# EAGLE board canprotoshieldcpy (EAGLE 7.2.0)
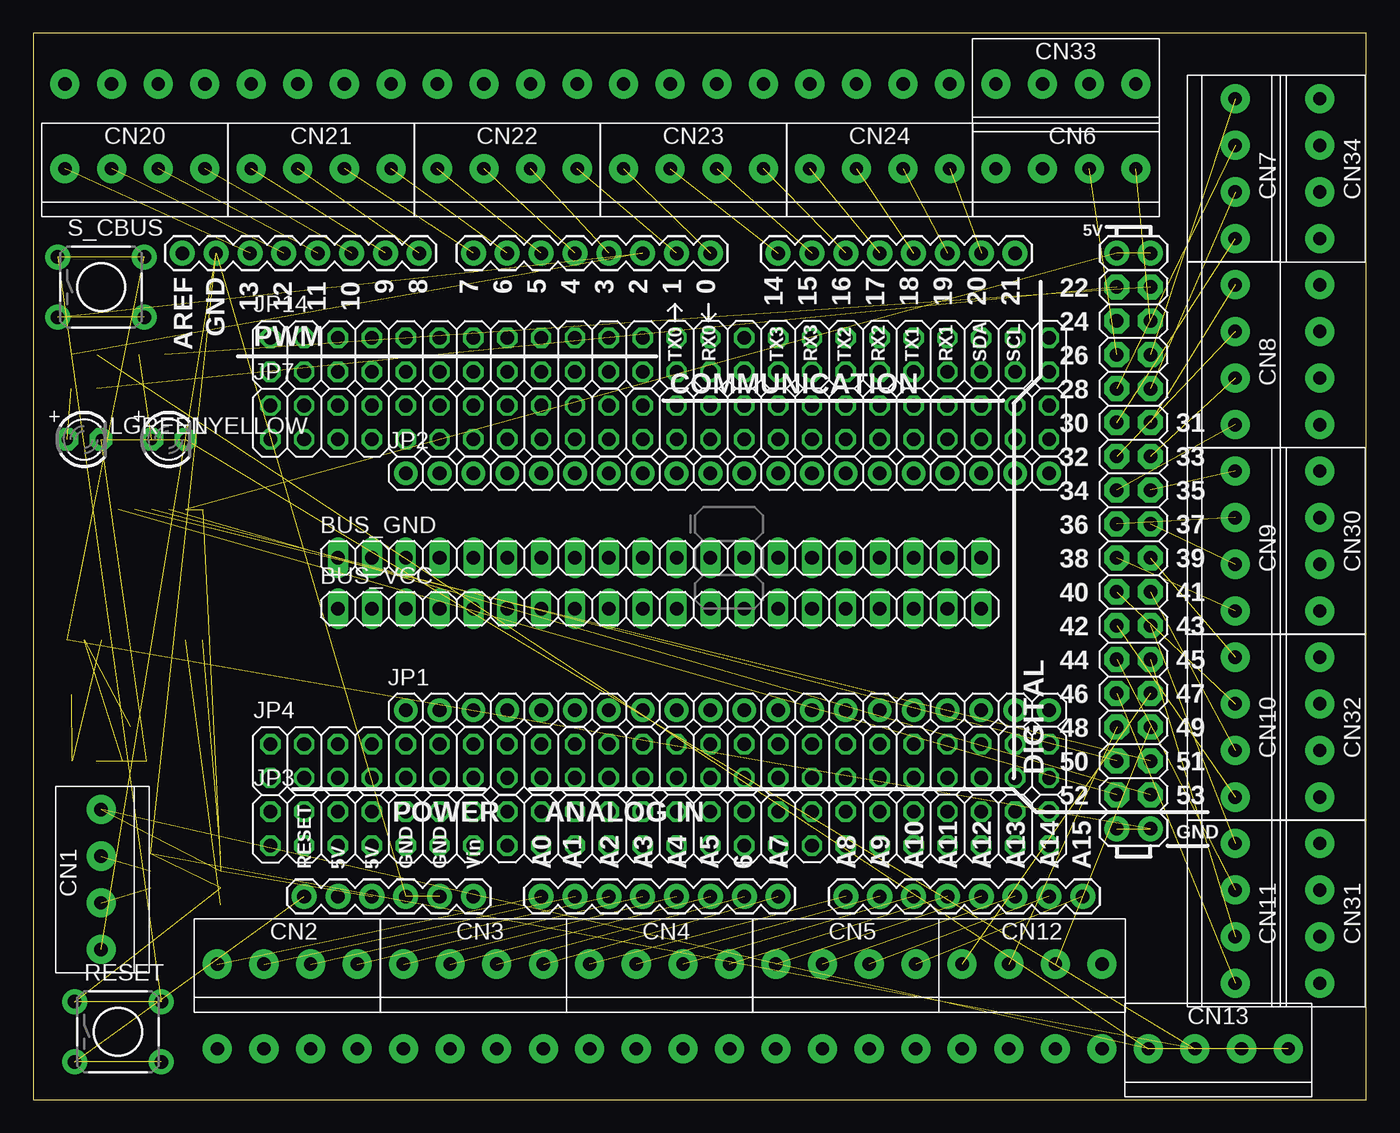
[diagram p0: board, top side]
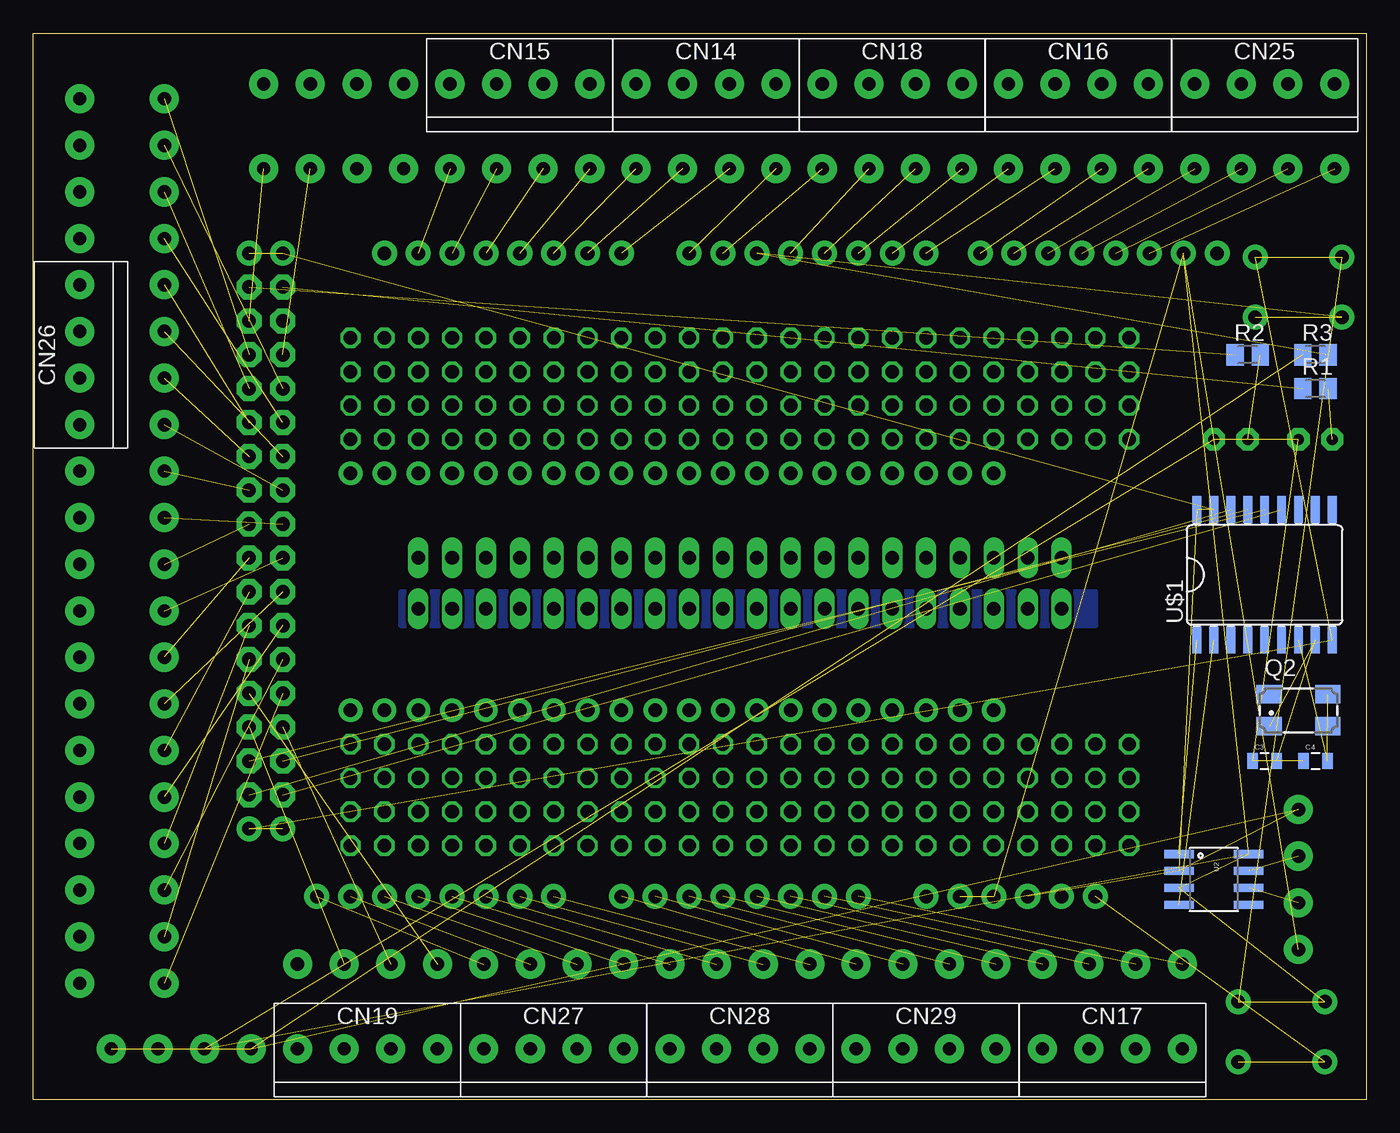
[diagram p1: board, bottom side, seen from below]

Size 100 x 80 mm. Coordinates in mm from the lower left corner, seen from the top.
Outline: 0,0 100,0 100,80 0,80 0,0
Copper layers (1*16): Top 0.035mm / dielectric 1.5mm / Bottom 0.035mm
Design rules "default": minimum track width 10mil, minimum drill 24mil, track to track 8mil, track to pad 8mil, pad to pad 8mil, via to via 8mil, smd to smd 8mil, copper to edge 40mil, drill to drill 8mil, minimum pad ring 10mil, minimum via ring 8mil, stop-mask expansion 4mil, vias tented up to drill 0mil, thermal gap 10mil

## Footprints (pad centres in the part's own frame; a part is rotated, then mirrored left to right if it is on the bottom)
1X20 = drill 1.016 long: 1 -24.13,0; 2 -21.59,0; 3 -19.05,0; 4 -16.51,0; 5 -13.97,0; 6 -11.43,0; 7 -8.89,0; 8 -6.35,0; 9 -3.81,0; 10 -1.27,0; 11 1.27,0; 12 3.81,0; 13 6.35,0; 14 8.89,0; 15 11.43,0; 16 13.97,0; 17 16.51,0; 18 19.05,0; 19 21.59,0; 20 24.13,0
0805 = smd 0.8 x 1.2: 1 -0.9,0; 2 0.9,0
1X04-3.5MM = drill 1 pad 2.184: 1 -5.25,0; 2 -1.75,0; 3 1.75,0; 4 5.25,0
1X20-BIG = drill 1.016 pad 1.778: 1 -24.13,0; 2 -21.59,0; 3 -19.05,0; 4 -16.51,0; 5 -13.97,0; 6 -11.43,0; 7 -8.89,0; 8 -6.35,0; 9 -3.81,0; 10 -1.27,0; 11 1.27,0; 12 3.81,0; 13 6.35,0; 14 8.89,0; 15 11.43,0; 16 13.97,0; 17 16.51,0; 18 19.05,0; 19 21.59,0; 20 24.13,0
2X24 = drill 1.016 octagon: 1 -27.94,-1.27; 2 -27.94,1.27; 3 -25.4,-1.27; 4 -25.4,1.27; 5 -22.86,-1.27; 6 -22.86,1.27; 7 -20.32,-1.27; 8 -20.32,1.27; 9 -17.78,-1.27; 10 -17.78,1.27; 11 -15.24,-1.27; 12 -15.24,1.27; 13 -12.7,-1.27; 14 -12.7,1.27; 15 -10.16,-1.27; 16 -10.16,1.27; 17 -7.62,-1.27; 18 -7.62,1.27; 19 -5.08,-1.27; 20 -5.08,1.27; 21 -2.54,-1.27; 22 -2.54,1.27; 23 0,-1.27; 24 0,1.27; 25 2.54,-1.27; 26 2.54,1.27; 27 5.08,-1.27; 28 5.08,1.27; 29 7.62,-1.27; 30 7.62,1.27; 31 10.16,-1.27; 32 10.16,1.27; 33 12.7,-1.27; 34 12.7,1.27; 35 15.24,-1.27; 36 15.24,1.27; 37 17.78,-1.27; 38 17.78,1.27; 39 20.32,-1.27; 40 20.32,1.27; 41 22.86,-1.27; 42 22.86,1.27; 43 25.4,-1.27; 44 25.4,1.27; 45 27.94,-1.27; 46 27.94,1.27; 47 30.48,-1.27; 48 30.48,1.27
LED3MM = drill 0.813 pad 1.676 octagon: A -1.27,0; K 1.27,0
CTS406 = smd 1.9 x 1.4: 1 -2.2,-1.2; 2 2.2,-1.2; 3 2.2,1.2; 4 -2.2,1.2
M2012 = smd 1.3 x 1.6: 1 -0.95,0; 2 0.95,0
TACTILE-PTH = drill 1.016 pad 1.88: 1 -3.251,2.261; 2 3.251,2.261; 3 -3.251,-2.261; 4 3.251,-2.261
SO08 = smd 0.61 x 2.21: 1 -1.905,-2.616; 2 -0.635,-2.616; 3 0.635,-2.616; 4 1.905,-2.616; 5 1.905,2.616; 6 0.635,2.616; 7 -0.635,2.616; 8 -1.905,2.616
ARDUINO_MEGA = drill 1.016 pad 1.88: 0 63.5,50.8; 1 60.96,50.8; 2 58.42,50.8; 3 55.88,50.8; 3.3V 35.56,2.54; 4 53.34,50.8; 5 50.8,50.8; 5V@0 38.1,2.54; 5V@1 93.98,50.8; 5V@2 96.52,50.8; 6 48.26,50.8; 7 45.72,50.8; 8 41.656,50.8; 9 39.116,50.8; 10 36.576,50.8; 11 34.036,50.8; 12 31.496,50.8; 13 28.956,50.8; 14 68.58,50.8; 15 71.12,50.8; 16 73.66,50.8; 17 76.2,50.8; 18 78.74,50.8; 19 81.28,50.8; 20 83.82,50.8; 21 86.36,50.8; A0 50.8,2.54; A1 53.34,2.54; A2 55.88,2.54; A3 58.42,2.54; A4 60.96,2.54; A5 63.5,2.54; A6 66.04,2.54; A7 68.58,2.54; A8 73.66,2.54; A9 76.2,2.54; A10 78.74,2.54; A11 81.28,2.54; A12 83.82,2.54; A13 86.36,2.54; A14 88.9,2.54; A15 91.44,2.54; AREF 23.876,50.8; GND@0 40.64,2.54; GND@1 43.18,2.54; GND@2 93.98,7.62; GND@3 96.52,7.62; GND@4 26.416,50.8; RESET 33.02,2.54; VIN 45.72,2.54 | drill 1.016 pad 1.88 octagon: 22 93.98,48.26; 23 96.52,48.26; 24 93.98,45.72; 25 96.52,45.72; 26 93.98,43.18; 27 96.52,43.18; 28 93.98,40.64; 29 96.52,40.64; 30 93.98,38.1; 31 96.52,38.1; 32 93.98,35.56; 33 96.52,35.56; 34 93.98,33.02; 35 96.52,33.02; 36 93.98,30.48; 37 96.52,30.48; 38 93.98,27.94; 39 96.52,27.94; 40 93.98,25.4; 41 96.52,25.4; 42 93.98,22.86; 43 96.52,22.86; 44 93.98,20.32; 45 96.52,20.32; 46 93.98,17.78; 47 96.52,17.78; 48 93.98,15.24; 49 96.52,15.24; 50 93.98,12.7; 51 96.52,12.7; 52 93.98,10.16; 53 96.52,10.16
SO18L = smd 0.66 x 2.032: 1 -5.08,-4.902; 2 -3.81,-4.902; 3 -2.54,-4.902; 4 -1.27,-4.902; 5 0,-4.902; 6 1.27,-4.902; 7 2.54,-4.902; 8 3.81,-4.902; 9 5.08,-4.902; 10 5.08,4.902; 11 3.81,4.902; 12 2.54,4.902; 13 1.27,4.902; 14 0,4.902; 15 -1.27,4.902; 16 -2.54,4.902; 17 -3.81,4.902; 18 -5.08,4.902

## Placement (x,y rotation side)
BUS_GND  [1X20]  46.99,40.64 0 top
BUS_VCC  [1X20]  46.99,36.83 0 top
C3  10pF  [0805]  7.62,25.4 0 bottom
C4  10pF  [0805]  3.81,25.4 0 bottom
CN1  1X4-3.5MM  [1X04-3.5MM]  5.08,16.51 90 top
CN2  1X4-3.5MM  [1X04-3.5MM]  19.05,10.16 0 top
CN3  1X4-3.5MM  [1X04-3.5MM]  33.02,10.16 0 top
CN4  1X4-3.5MM  [1X04-3.5MM]  46.99,10.16 0 top
CN5  1X4-3.5MM  [1X04-3.5MM]  60.96,10.16 0 top
CN6  1X4-3.5MM  [1X04-3.5MM]  77.47,69.85 0 top
CN7  1X4-3.5MM  [1X04-3.5MM]  90.17,69.85 270 top
CN8  1X4-3.5MM  [1X04-3.5MM]  90.17,55.88 270 top
CN9  1X4-3.5MM  [1X04-3.5MM]  90.17,41.91 270 top
CN10  1X4-3.5MM  [1X04-3.5MM]  90.17,27.94 270 top
CN11  1X4-3.5MM  [1X04-3.5MM]  90.17,13.97 270 top
CN12  1X4-3.5MM  [1X04-3.5MM]  74.93,10.16 0 top
CN13  1X4-3.5MM  [1X04-3.5MM]  88.9,3.81 0 top
CN14  1X4-3.5MM  [1X04-3.5MM]  49.53,76.2 0 bottom
CN15  1X4-3.5MM  [1X04-3.5MM]  63.5,76.2 0 bottom
CN16  1X4-3.5MM  [1X04-3.5MM]  21.59,76.2 0 bottom
CN17  1X4-3.5MM  [1X04-3.5MM]  19.05,3.81 0 bottom
CN18  1X4-3.5MM  [1X04-3.5MM]  35.56,76.2 0 bottom
CN19  1X4-3.5MM  [1X04-3.5MM]  74.93,3.81 0 bottom
CN20  1X4-3.5MM  [1X04-3.5MM]  7.62,69.85 0 top
CN21  1X4-3.5MM  [1X04-3.5MM]  21.59,69.85 0 top
CN22  1X4-3.5MM  [1X04-3.5MM]  35.56,69.85 0 top
CN23  1X4-3.5MM  [1X04-3.5MM]  49.53,69.85 0 top
CN24  1X4-3.5MM  [1X04-3.5MM]  63.5,69.85 0 top
CN25  1X4-3.5MM  [1X04-3.5MM]  7.62,76.2 0 bottom
CN26  1X4-3.5MM  [1X04-3.5MM]  96.52,55.88 90 bottom
CN27  1X4-3.5MM  [1X04-3.5MM]  60.96,3.81 0 bottom
CN28  1X4-3.5MM  [1X04-3.5MM]  46.99,3.81 0 bottom
CN29  1X4-3.5MM  [1X04-3.5MM]  33.02,3.81 0 bottom
CN30  1X4-3.5MM  [1X04-3.5MM]  96.52,41.91 270 top
CN31  1X4-3.5MM  [1X04-3.5MM]  96.52,13.97 270 top
CN32  1X4-3.5MM  [1X04-3.5MM]  96.52,27.94 270 top
CN33  1X4-3.5MM  [1X04-3.5MM]  77.47,76.2 0 top
CN34  1X4-3.5MM  [1X04-3.5MM]  96.52,69.85 270 top
JP1  [1X20-BIG]  52.07,29.21 0 top
JP2  [1X20-BIG]  52.07,46.99 0 top
JP3  [2X24]  45.72,20.32 0 top
JP4  [2X24]  45.72,25.4 0 top
JP7  [2X24]  45.72,50.8 0 top
JP14  [2X24]  45.72,55.88 0 top
LGREEN  2.2V  [LED3MM]  3.81,49.53 0 top
LYELLOW  2.2V  [LED3MM]  10.16,49.53 0 top
Q2  [CTS406]  5.08,29.21 0 bottom
R1  220  [M2012]  3.81,53.34 0 bottom
R2  220  [M2012]  8.89,55.88 0 bottom
R3  10k  [M2012]  3.81,55.88 0 bottom
RESET  [TACTILE-PTH]  6.35,5.08 0 top
S_CBUS  [TACTILE-PTH]  5.08,60.96 0 top
U2  MCP2551  [SO08]  11.43,16.51 270 bottom
U3  ARDUINO-MEGAFULL  [ARDUINO_MEGA]  -12.7,12.7 0 top
U$1  MCP2515SO  [SO18L]  7.62,39.37 0 bottom

## Library data of the parts
BUS_GND BUS_VCC JP1 JP2 LGREEN LYELLOW R1-R3 = adafruit
C3 C4 = SparkFun-Capacitors
CN1-CN34 U3 = Arduino_merg
JP3 JP4 JP7 JP14 = pinhead
Q2 = adafruit; OC_FARNELL: unknown; OC_NEWARK: unknown
RESET S_CBUS = SparkFun-Retired
U2 = SparkFun-DigitalIC; PROD_ID: IC-09907
U$1 = MCP2515_MT

## Nets
0: CN23.1 U3.0
1: CN22.4 U3.1
2: R3.2 S_CBUS.3 S_CBUS.4 U3.2
3: CN22.3 U3.3
4: CN22.2 U3.4
5: CN22.1 U3.5
6: CN21.4 U3.6
7: CN21.3 U3.7
8: CN21.2 U3.8
9: CN21.1 U3.9
10: CN20.4 U3.10
11: CN20.3 U3.11
12: CN20.2 U3.12
13: CN20.1 U3.13
14: CN23.2 U3.14
15: CN23.3 U3.15
16: CN23.4 U3.16
17: CN24.1 U3.17
18: CN24.2 U3.18
19: CN24.3 U3.19
20: CN24.4 U3.20
21: U3.21
22: R1.1 U3.22
23: R2.1 U3.23
24: U3.24
25: CN6.4 U3.25
26: CN6.3 U3.26
27: CN7.1 U3.27
28: CN7.2 U3.28
29: CN7.3 U3.29
30: CN7.4 U3.30
31: CN8.1 U3.31
32: CN8.2 U3.32
33: CN8.3 U3.33
34: CN8.4 U3.34
35: CN9.1 U3.35
36: CN9.2 U3.36
37: CN9.3 U3.37
38: CN9.4 U3.38
39: CN10.1 U3.39
40: CN10.2 U3.40
41: CN10.3 U3.41
42: CN10.4 U3.42
43: CN11.1 U3.43
44: CN11.2 U3.44
45: CN11.3 U3.45
46: CN11.4 U3.46
47: CN12.1 U3.47
48: CN12.2 U3.48
49: CN12.3 U3.49
A0: CN2.1 U3.A0
A1: CN2.2 U3.A1
A2: CN2.3 U3.A2
A3: CN2.4 U3.A3
A4: CN3.1 U3.A4
A5: CN3.2 U3.A5
A6: CN3.3 U3.A6
A7: CN3.4 U3.A7
A8: CN4.1 U3.A8
A9: CN4.2 U3.A9
A10: CN4.3 U3.A10
A11: CN4.4 U3.A11
A12: CN5.1 U3.A12
A13: CN5.2 U3.A13
A14: CN5.3 U3.A14
A15: CN5.4 U3.A15
CANH: CN1.3 U2.7
CANL: CN1.2 U2.6
GND: C3.1 C4.1 CN1.1 CN13.2 CN13.3 LGREEN.K LYELLOW.K RESET.1 RESET.2 S_CBUS.1 S_CBUS.2 U2.3 U2.8 U3.GND@0 U3.GND@1 U3.GND@2 U3.GND@3 U3.GND@4 U$1.9
MCP_CS: U3.53 U$1.16
MCP_INT: U$1.12
MCP_SCK: U3.52 U$1.13
MCP_SI: U3.51 U$1.14
MCP_SO: U3.50 U$1.15
N$1: C4.2 Q2.3 U$1.7
N$2: C3.2 Q2.1 U$1.8
N$3: LYELLOW.A R2.2
N$4: LGREEN.A R1.2
N$5: BUS_VCC.1
N$6: BUS_VCC.2
N$7: BUS_VCC.3
N$8: BUS_VCC.4
N$9: RESET.3 RESET.4 U3.RESET
N$10: BUS_VCC.5
N$11: BUS_VCC.6
N$12: BUS_VCC.7
N$13: BUS_VCC.8
N$14: CN12.4
N$15: BUS_VCC.9
N$16: BUS_VCC.10
N$17: BUS_VCC.11
N$18: BUS_VCC.12
N$19: CN25.1
N$20: CN25.2
N$21: CN25.3
N$22: CN25.4
N$23: BUS_VCC.13
N$24: BUS_VCC.14
N$25: BUS_VCC.15
N$26: BUS_VCC.16
N$27: BUS_VCC.17
N$28: BUS_VCC.18
N$29: BUS_VCC.19
N$30: BUS_VCC.20
N$31: BUS_GND.1
N$32: BUS_GND.2
N$33: BUS_GND.3
N$34: BUS_GND.4
N$35: BUS_GND.5
N$36: BUS_GND.6
N$37: BUS_GND.7
N$38: BUS_GND.8
N$39: BUS_GND.9
N$40: BUS_GND.10
N$41: BUS_GND.11
N$42: BUS_GND.12
N$43: BUS_GND.13
N$44: BUS_GND.14
N$45: BUS_GND.15
N$46: BUS_GND.16
N$47: BUS_GND.17
N$48: BUS_GND.18
N$49: BUS_GND.19
N$50: BUS_GND.20
RXCAN: U2.4 U$1.2
TXCAN: U2.1 U$1.1
VCC: CN1.4 CN13.1 CN13.4 R3.1 U2.2 U3.5V@0 U3.5V@1 U3.5V@2 U$1.17 U$1.18
VIN: U3.VIN

## Tracks (layer width: path | path; a pad name or v marks a point on that pad's centre or on a via)
0  (1 unrouted)
1  (1 unrouted)
2  (3 unrouted)
3  (1 unrouted)
4  (1 unrouted)
5  (1 unrouted)
6  (1 unrouted)
7  (1 unrouted)
8  (1 unrouted)
9  (1 unrouted)
10  (1 unrouted)
11  (1 unrouted)
12  (1 unrouted)
13  (1 unrouted)
14  (1 unrouted)
15  (1 unrouted)
16  (1 unrouted)
17  (1 unrouted)
18  (1 unrouted)
19  (1 unrouted)
20  (1 unrouted)
22  (1 unrouted)
23  (1 unrouted)
25  (1 unrouted)
26  (1 unrouted)
27  (1 unrouted)
28  (1 unrouted)
29  (1 unrouted)
30  (1 unrouted)
31  (1 unrouted)
32  (1 unrouted)
33  (1 unrouted)
34  (1 unrouted)
35  (1 unrouted)
36  (1 unrouted)
37  (1 unrouted)
38  (1 unrouted)
39  (1 unrouted)
40  (1 unrouted)
41  (1 unrouted)
42  (1 unrouted)
43  (1 unrouted)
44  (1 unrouted)
45  (1 unrouted)
46  (1 unrouted)
47  (1 unrouted)
48  (1 unrouted)
49  (1 unrouted)
A0  (1 unrouted)
A1  (1 unrouted)
A2  (1 unrouted)
A3  (1 unrouted)
A4  (1 unrouted)
A5  (1 unrouted)
A6  (1 unrouted)
A7  (1 unrouted)
A8  (1 unrouted)
A9  (1 unrouted)
A10  (1 unrouted)
A11  (1 unrouted)
A12  (1 unrouted)
A13  (1 unrouted)
A14  (1 unrouted)
A15  (1 unrouted)
CANH  (1 unrouted)
CANL  (1 unrouted)
GND  (18 unrouted)
MCP_CS  (1 unrouted)
MCP_SCK  (1 unrouted)
MCP_SI  (1 unrouted)
MCP_SO  (1 unrouted)
N$1  (2 unrouted)
N$2  (2 unrouted)
N$3  (1 unrouted)
N$4  (1 unrouted)
N$9  (2 unrouted)
RXCAN  (1 unrouted)
TXCAN  (1 unrouted)
VCC  (9 unrouted)
  pour Bottom: 20.32,38.1 72.39,38.1 72.39,35.56 20.32,35.56